# EAGLE board module S-RX28_rev05 644 (EAGLE 9.3.1)
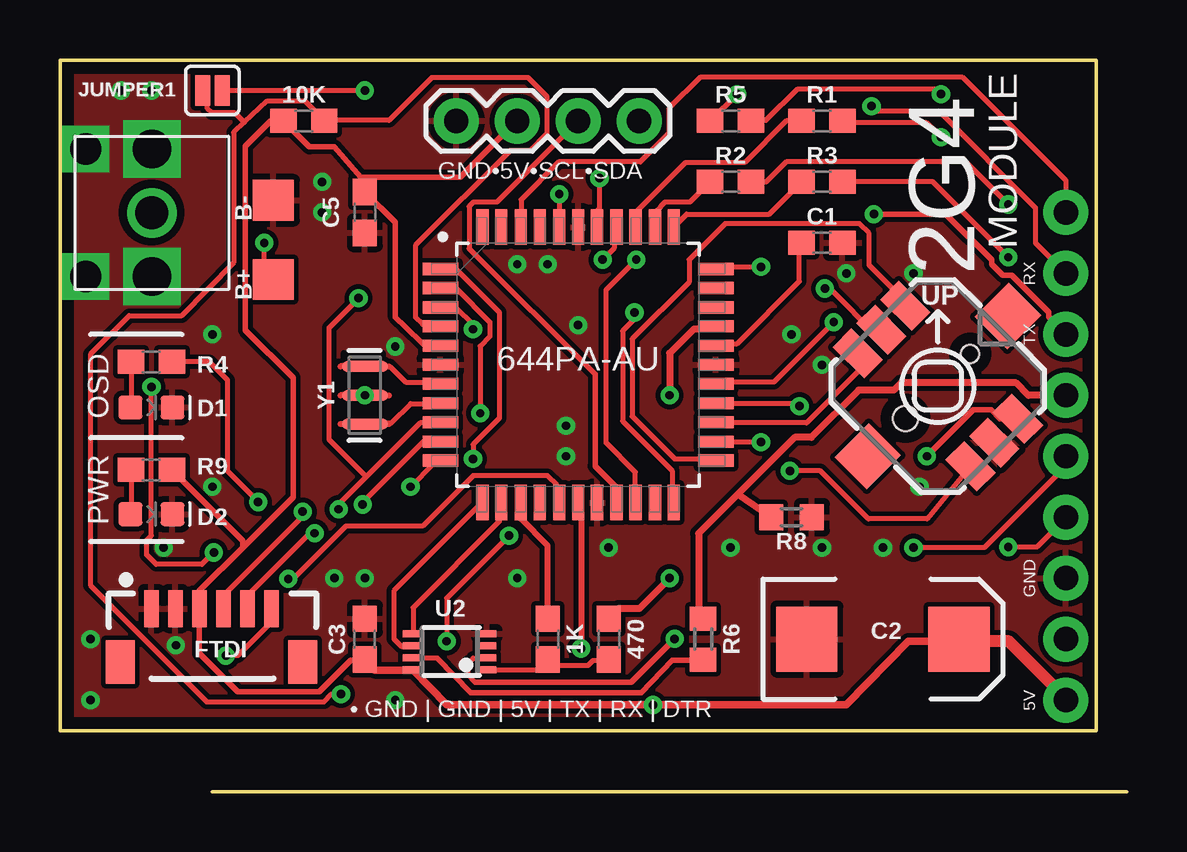
[diagram p0: board, top side]
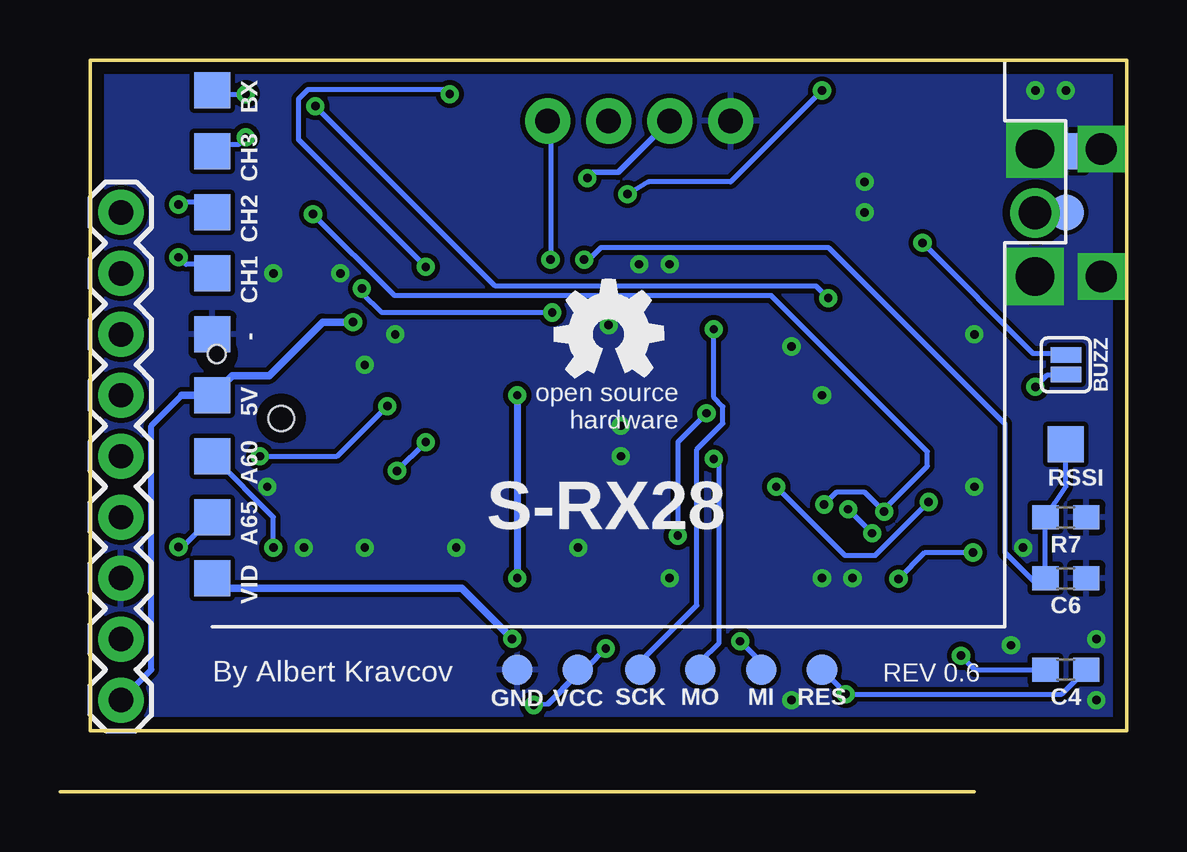
[diagram p1: board, bottom side, seen from below]

Size 44.45 x 30.48 mm. Coordinates in mm from the lower left corner, seen from the top.
Outline: 0,2.54 0,30.48 43.18,30.48 43.18,2.54 0,2.54
Copper layers (1*16): Top 0.035mm / dielectric 1.5mm / Bottom 0.035mm
Design rules "default *": minimum track width 6mil, minimum drill 0.35mm, track to track 6mil, track to pad 6mil, pad to pad 6mil, via to via 6mil, smd to smd 6mil, copper to edge 0.5mm, drill to drill 6mil, minimum pad ring 10mil, minimum via ring 8mil, stop-mask expansion 4mil, vias tented up to drill 2mm, thermal gap 10mil
Net classes: 0 default: width 0.2 mm, clearance 0.2 mm; 1 power: width 0.3 mm, drill 0.3 mm, clearance 0.3 mm
tRestrict: area 11.8,14.7 to 13.5,18.3

## Footprints (pad centres in the part's own frame; a part is rotated, then mirrored left to right if it is on the bottom)
0603 = smd 1.1 x 1: 1 -0.85,0; 2 0.85,0
TP15SQ = smd 1.5 x 1.5: TP 0,0
TP15R = smd 1.5 x 1.5: TP 0,0
TP17SQ = smd 1.7 x 1.7: TP 0,0
SMT-JUMPER_2_NC_PASTE_SILK = smd 0.635 x 1.27: 1 -0.406,0; 2 0.406,0
EIA7343 = smd 2.55 x 2.7: A 3.17,0; C -3.17,0
C0603 = smd 1.1 x 1: 1 -0.85,0; 2 0.85,0
LED-0603 = smd 1 x 1: A -0.877,0; C 0.877,0
1X06-1MM = smd 0.6 x 1.55: 1 -2.54,1.27; 2 -1.54,1.27; 3 -0.54,1.27; 4 0.46,1.27; 5 1.46,1.27; 6 2.46,1.27 | smd 1.2 x 1.8: P$1 -3.84,-0.955; P$2 3.76,-0.955
B1,27 = smd 1.27 x 1.27: TP 0,0
1X04 = drill 1.016 pad 1.88: 1 0,0; 2 2.54,0; 3 5.08,0; 4 7.62,0
1X09 = drill 1.016 pad 1.88: 1 0,0; 2 2.54,0; 3 5.08,0; 4 7.62,0; 5 10.16,0; 6 12.7,0; 7 15.24,0; 8 17.78,0; 9 20.32,0
R0603 = smd 1 x 1.1: 1 -0.85,0; 2 0.85,0
JOYSTICK_MINI = smd 1.85 x 1.1: A -3.325,1.4; B 3.325,1.4; C -3.325,-1.4; CTR -3.325,0; D 3.325,-1.4; GND 3.325,0 | smd 1.9 x 2: NC 0,4.13; NC@0 0,-4.13 | hole 0.75: 0,1.9 | hole 1.05: 0,-1.9
QFP80P1200X1200X120-44N = smd 1.473 x 0.508: 1 -5.74,3.988; 2 -5.74,3.2; 3 -5.74,2.388; 4 -5.74,1.6; 5 -5.74,0.787; 6 -5.74,0; 7 -5.74,-0.787; 8 -5.74,-1.6; 9 -5.74,-2.388; 10 -5.74,-3.2; 11 -5.74,-3.988; 23 5.74,-3.988; 24 5.74,-3.2; 25 5.74,-2.388; 26 5.74,-1.6; 27 5.74,-0.787; 28 5.74,0; 29 5.74,0.787; 30 5.74,1.6; 31 5.74,2.388; 32 5.74,3.2; 33 5.74,3.988 | smd 0.508 x 1.473: 12 -3.988,-5.74; 13 -3.2,-5.74; 14 -2.388,-5.74; 15 -1.6,-5.74; 16 -0.787,-5.74; 17 0,-5.74; 18 0.787,-5.74; 19 1.6,-5.74; 20 2.388,-5.74; 21 3.2,-5.74; 22 3.988,-5.74; 34 3.988,5.74; 35 3.2,5.74; 36 2.388,5.74; 37 1.6,5.74; 38 0.787,5.74; 39 0,5.74; 40 -0.787,5.74; 41 -1.6,5.74; 42 -2.388,5.74; 43 -3.2,5.74; 44 -3.988,5.74
VFSOP-8 = smd 0.3 x 0.8: 1 0,0; 2 0.5,0; 3 1,0; 4 1.5,0; 5 1.5,3.1; 6 1,3.1; 7 0.5,3.1; 8 0,3.1
SMA_CONNECTOR = drill 1.37: ANT -0.02,-0.017 | drill 1.3 square: P$1 -2.67,2.743; P$2 2.64,2.743 | drill 1.6 square: P$3 -2.67,-0.017; P$4 2.64,-0.017
RESONATOR-SMD-3.2X1.3 = smd 0.45 x 1.905: 1 -1.2,0; 2 0,0; 3 1.2,0

## Placement (x,y rotation side)
1K  [0603]  20.32,6.35 270 top
5V  TPTP15SQ  [TP15SQ]  38.1,16.51 0 bottom
10K  [0603]  10.16,27.94 180 top
470  [0603]  22.86,6.35 270 top
-  TPTP15SQ  [TP15SQ]  38.1,19.05 0 bottom
A60  TPTP15SQ  [TP15SQ]  38.1,13.97 0 bottom
A65  TPTP15SQ  [TP15SQ]  38.1,11.43 0 bottom
ANT  TPTP15R  [TP15R]  2.54,24.13 0 bottom
B+  TPTP17SQ  [TP17SQ]  8.89,21.34 0 top
B-  TPTP17SQ  [TP17SQ]  8.89,24.64 0 top
BUZZ  JUMPER-SMT_2_NC_PASTE_SILK  [SMT-JUMPER_2_NC_PASTE_SILK]  2.54,17.78 270 bottom
BX  TPTP15SQ  [TP15SQ]  38.1,29.21 0 bottom
C1  100nF  [0603]  31.75,22.86 0 top
C2  470uf  [EIA7343]  34.29,6.35 0 top
C3  100nF  [C0603]  12.7,6.35 90 top
C4  100nF  [0603]  2.54,5.08 180 bottom
C5  100nF  [0603]  12.7,24.13 270 top
C6  0.1uF  [0603]  2.54,8.89 180 bottom
CH1  TPTP15SQ  [TP15SQ]  38.1,21.59 0 bottom
CH2  TPTP15SQ  [TP15SQ]  38.1,24.13 0 bottom
CH3  TPTP15SQ  [TP15SQ]  38.1,26.67 0 bottom
D1  [LED-0603]  3.81,16 0 top
D2  [LED-0603]  3.81,11.56 0 top
FTDI  [1X06-1MM]  6.35,6.35 0 top
G  TPTP15SQ  [TP15SQ]  2.54,26.67 0 bottom
GND  GND  [B1,27]  25.4,5.08 0 bottom
GND•5V•SCL•SDA  [1X04]  16.51,27.94 0 top
GOOGLE_IO  [1X09]  41.91,3.81 90 bottom
JUMPER1  JUMPER-SMT_2_NC_PASTE_SILK  [SMT-JUMPER_2_NC_PASTE_SILK]  6.35,29.21 0 top
MI  TPSQB1,27  [B1,27]  15.24,5.08 0 bottom
MO  TPSQB1,27  [B1,27]  17.78,5.08 0 bottom
R1  1k  [0603]  31.75,27.94 0 top
R2  1k  [0603]  27.94,25.4 0 top
R3  1k  [0603]  31.75,25.4 0 top
R4  330  [0603]  3.81,17.91 180 top
R5  1k  [0603]  27.94,27.94 0 top
R6  10R  [R0603]  26.8,6.35 90 top
R7  100k  [0603]  2.54,11.43 180 bottom
R8  75R  [R0603]  30.48,11.43 0 top
R9  330  [0603]  3.81,13.41 180 top
RES  TPSQB1,27  [B1,27]  12.7,5.08 0 bottom
RSSI  TPTP15SQ  [TP15SQ]  2.54,14.48 0 bottom
S2  [JOYSTICK_MINI]  36.58,16.89 315 top
SCK  TPSQB1,27  [B1,27]  20.27,5.08 0 bottom
U1  ATMEGA644PA-AU  [QFP80P1200X1200X120-44N]  21.59,17.78 0 top
U2  [VFSOP-8]  17.78,5.08 90 top
U$1  SMA_ANTENNA  [SMA_CONNECTOR]  3.81,24.13 90 top
U$2  [OSHW_5MM]  21.59,19.05 0 bottom
VCC  TPSQB1,27  [B1,27]  22.89,5.08 0 bottom
VID  TPTP15SQ  [TP15SQ]  38.1,8.89 0 bottom
Y1  16MHz  [RESONATOR-SMD-3.2X1.3]  12.7,16.51 90 top

## Library data of the parts
1K 10K 470 = SparkFun-Resistors; PROD_ID: RES-08787
5V - A60 A65 ANT B+ B- BX CH1-CH3 G GND MI MO RES RSSI SCK VCC VID = testpad
BUZZ JUMPER1 = SparkFun-Jumpers
C1 C4-C6 = SparkFun-Capacitors; PROD_ID: CAP-00867
C2 = SparkFun-Passives
C3 = adafruit
D1 D2 = SparkFun-LED
FTDI = SparkFun-Connectors; PROD_ID: CONN-08249; SF_ID: GPS-00579
GND•5V•SCL•SDA = SparkFun-Connectors; PROD_ID: CONN-09696
GOOGLE_IO = SparkFun-Connectors
R1-R3 R5 R7 R9 = SparkFun-Resistors; PROD_ID: RES-12535
R4 = SparkFun-Resistors; PROD_ID: RES-12535; VALUE: 0.05
R6 R8 = resistor
S2 = SparkFun-Switches; PROD_ID: SWCH-09905; SF_SKU: COM-10063
U1 = ATMEGA644PA-AU; AVAILABILITY: Unavailable; DESCRIPTION: ATmega Series 20 MHz 64 KB Flash 4 KB SRAM 8-Bit Microcontroller - TQFP-44; MF: Microchip; MP: ATMEGA644PA-AU; PACKAGE: TQFP-44 Microchip; PRICE: None
U2 = ts5a3359
U$1 = #fpv
U$2 = oshw
Y1 = SparkFun-Clocks; PROD_ID: XTAL-08900

## Nets
5V: 5V.TP 10K.2 C2.A C3.1 C5.1 FTDI.3 GND•5V•SCL•SDA.2 GOOGLE_IO.1 R9.1 U1.5 U1.17 U1.27 U1.38 U2.8 VCC.TP
A_L: A60.TP GOOGLE_IO.5
A_R: A65.TP GOOGLE_IO.4
ANT [power]: ANT.TP U$1.ANT
AREF: C1.1 U1.29
BT0: S2.CTR U1.22
BT1: S2.A U1.23
BT2: S2.D U1.24
BT3: S2.C U1.25
BT4: S2.B U1.26
BUZZER: BUZZ.2 U1.16
BX: R5.1 U1.33
C1: R3.1 U1.34
C2: R2.1 U1.35
C3: R1.1 U1.36
CH1: GOOGLE_IO.9 U1.42
CH2/RXD0: FTDI.5 GOOGLE_IO.8 U1.9
CH3/TXD0: FTDI.4 GOOGLE_IO.7 U1.10
DTR: C4.2 FTDI.6
GND: -.TP B-.TP C1.2 C2.C C3.2 C5.2 C6.1 D1.C D2.C FTDI.1 FTDI.2 G.TP GND.TP GND•5V•SCL•SDA.1 GOOGLE_IO.3 R7.1 R8.2 S2.GND U1.6 U1.18 U1.28 U1.39 U2.4 U$1.P$1 U$1.P$2 U$1.P$3 U$1.P$4 Y1.2
LED: R4.1 U1.11
MI: MI.TP U1.2
MO: MO.TP U1.1
N$1: CH3.TP R1.2
N$2: B+.TP BUZZ.1
N$3: CH2.TP R2.2
N$4: CH1.TP R3.2
N$5: BX.TP R5.2
OSD_CONTR1: U1.13 U2.5
OSD_CONTR2: U1.12 U2.6
OSD_OUT: 1K.2 470.2 U2.1
RED: D1.A R4.2
RED1: D2.A R9.2
RES: 10K.1 C4.1 JUMPER1.1 RES.TP U1.4
RESPIN: JUMPER1.2 U1.40
RSSI_IN: C6.2 R7.2 RSSI.TP U1.37
SCK: SCK.TP U1.3
SCL: GND•5V•SCL•SDA.3 U1.19
SDA: GND•5V•SCL•SDA.4 U1.20
SYNC: 1K.1 U1.14
VIDEO [power]: GOOGLE_IO.6 R6.2 R8.1
VIDEO_MOD: U2.2 VID.TP
VIDEOOUTPUT: R6.1 U2.7
VSIG [power]: 470.1 U1.30
XTAL1: U1.8 Y1.1
XTAL2: U1.7 Y1.3

## Tracks (layer width: path | path; a pad name or v marks a point on that pad's centre or on a via)
5V  (via drill 0.35)
  Top 0.2: v32.24,19.56 29.74,17.06 27.41,17.06 U1.27 | 37.48,6.26 C2.A 37.38,6.26 | 41.91,3.89 GOOGLE_IO.1 | 15.11,18.66 15.81,18.66 U1.5 | v22.48,25.56 22.48,24.29 22.31,24.11 22.31,23.56 U1.38 | 21.71,11.86 21.61,11.96 U1.17 | 13.11,5.06 12.71,5.46 C3.1 12.61,5.46 | 14.61,5.06 U2.8 14.71,5.06 | FTDI.3 5.81,8.36
  Top 0.229: 15.11,18.66 14.38,19.36 13.97,19.77 13.97,23.71 C5.1 12.7,25.4 12.54,25.59 | 5.81,8.36 7.62,10.16 | 7.62,10.16 9.71,12.26 9.71,17.24 7.73,19.23 7.73,26.89 8.78,27.94 10K.2 10.39,26.86 11.43,26.86 12.54,25.59 | 12.61,5.46 12.11,5.46 10.81,4.16 7.41,4.16 5.81,5.76 FTDI.3 | 12.54,25.59 16.68,25.59 19.05,27.96 GND•5V•SCL•SDA.2 | R9.1 7.62,10.46 7.62,10.16 | R9.1
  Top 0.254: 21.71,11.86 v21.71,5.96
  Top 0.305: 13.11,5.06 14.61,5.06 | 14.71,5.06 16.11,3.61 v24.71,3.61 32.75,3.61 35.35,6.26 37.38,6.26
  Top 0.508: 37.48,6.26 39.54,6.26 41.91,3.89
  Bottom 0.2: 38.32,16.12 38.72,16.51 | 22.51,5.16 22.81,5.16 VCC.TP 22.91,5.06 22.91,4.86 | v24.71,3.61 24.11,3.66
  Bottom 0.229: v21.71,5.96 22.51,5.16 | 24.11,3.66 22.91,4.86 | GND•5V•SCL•SDA.2 21.19,25.8 22.24,25.8 v22.48,25.56
  Bottom 0.254: GOOGLE_IO.1 40.64,5.08 40.64,15.24 39.37,16.51
  Bottom 0.3: 5V.TP 38.32,16.29 38.32,16.12
  Bottom 0.305: 39.37,16.51 38.72,16.51 | v32.24,19.56 33.51,19.56 35.74,17.33 37.28,17.33 5V.TP
A_L  (via drill 0.35)
  Top 0.203: v35.56,10.16 38.52,10.16 41.77,13.41 41.91,13.41 GOOGLE_IO.5
  Bottom 0.2: 38.01,14.06 A60.TP
  Bottom 0.203: v35.56,10.16 35.56,11.43 38.01,13.88
  Bottom 0.3: 38.01,13.88 38.01,14.06
A_R  (via drill 0.35)
  Top 0.2: v39.51,10.19 40.71,10.19 41.91,11.39 GOOGLE_IO.4
  Bottom 0.2: v39.51,10.19 39.34,10.19 A65.TP
ANT
  Bottom 0.3: ANT.TP 2.56,24.11
  Bottom 0.762: 2.56,24.11 U$1.ANT
AREF
  Top 0.2: C1.1 30.81,22.86 30.81,21.26 28.21,18.66 27.41,18.66 U1.29
BT0  (via drill 0.35)
  Top 0.2: v23.94,19.96 23.94,19.69 23.44,19.19 23.44,15.43 25.51,13.36 25.51,12.06 U1.22 | v31.87,20.96 32.07,20.96 34.1,18.93 35.01,18.93 34.69,18.77 S2.CTR
  Bottom 0.2: v23.94,19.96 31.04,19.96 31.87,20.79 v31.87,20.96
BT1
  Top 0.2: S2.A 35.22,20.43 33.71,21.93 33.71,23.26 33.31,23.66 27.71,23.66 26.21,22.16 26.21,21.23 23.84,18.86 23.84,15.63 25.61,13.86 27.31,13.86 U1.23
BT2  (via drill 0.35)
  Top 0.2: v29.21,14.56 27.41,14.56 U1.24 | S2.D 36.13,11.36 33.68,11.36 31.68,13.36 v30.41,13.36
  Bottom 0.2: v30.41,13.36 v29.21,14.56
BT3
  Top 0.2: U1.25 27.41,15.36 31.11,15.36 33.59,17.84 33.54,17.87 S2.C
BT4  (via drill 0.35)
  Top 0.2: v30.81,16.06 30.71,16.16 27.41,16.16 U1.26
  Top 0.229: S2.B 39.16,15.53 38.79,15.9 38.05,15.9 v36.12,13.97
  Bottom 0.2: v36.12,13.97 32.9,13.97 v30.81,16.06
BUZZER  (via drill 0.35)
  Top 0.2: U1.16 20.71,12.06 20.71,12.76 20.31,13.16 17.21,13.16 15.11,11.06 11.91,11.06 9.71,8.86 v9.51,8.86 | v3.81,16.86 3.81,10.66 3.61,10.46 3.61,9.86 4.01,9.46 5.91,9.46 v6.41,9.96
  Bottom 0.2: v3.81,16.86 3.31,17.36 2.61,17.36 BUZZ.2 | v6.41,9.96 8.41,9.96 v9.51,8.86
BX  (via drill 0.35)
  Top 0.2: v28.21,29.06 R5.1 | v29.21,21.86 27.41,21.86 U1.33
  Bottom 0.2: v28.21,29.06 28.23,29.06 28.43,29.26 34.11,29.26 34.51,28.86 34.51,27.16 v29.21,21.86
C1
  Top 0.2: R3.1 29.56,24.06 26.11,24.06 25.61,23.56 U1.34
C2
  Top 0.2: U1.35 24.81,23.56 24.81,24.13 25.02,24.34 25.02,24.38 25.2,24.56 26.25,24.56 R2.1
C3
  Top 0.2: U1.36 24.01,23.56 24.01,24.16 26.05,26.2 28.52,26.2 30.26,27.94 R1.1
CH1
  Top 0.2: U1.42 19.21,23.56 19.21,24.66 20.79,26.24 24.18,26.24 25.37,27.43 25.37,28.46 26.67,29.76 37.61,29.76 41.91,25.46 GOOGLE_IO.9
CH2/RXD0  (via drill 0.35)
  Top 0.2: 12.76,13.11 11.61,11.96 v11.61,11.76 | 12.76,13.11 15.01,15.36 15.81,15.36 U1.9 | v10.61,10.76 10.41,10.76 7.81,8.16 FTDI.5 | GOOGLE_IO.8 40.64,22.86 40.64,24.33 36.61,28.36 34.01,28.36 v33.81,28.56 | v12.44,20.56 11.21,19.33 11.21,14.66 12.76,13.11
  Bottom 0.2: v10.61,10.76 v11.61,11.76 | v33.81,28.56 26.31,21.06 12.94,21.06 v12.44,20.56
CH3/TXD0  (via drill 0.35)
  Top 0.2: v12.61,11.96 12.61,12.06 15.11,14.56 15.81,14.56 15.83,14.58 U1.10 | v10.11,11.66 10.11,11.46 6.81,8.16 FTDI.4 | 41.91,19.09 GOOGLE_IO.7 | 36.83,24.06 36.91,24.06
  Top 0.229: v33.91,24.06 36.83,24.06 | 41.91,19.09 41.88,19.09 41.19,19.78 41.19,19.98 39.66,21.51 39.29,21.51 38.82,21.97 38.82,22.15 36.91,24.06
  Bottom 0.2: v12.61,11.96 12.11,12.46 10.91,12.46 v10.11,11.66 10.11,11.76 8.31,13.56 8.31,14.16 14.81,20.66 30.51,20.66 v33.91,24.06
DTR  (via drill 0.35)
  Top 0.2: v6.91,5.66 7.41,5.66 8.81,7.06 FTDI.6
  Bottom 0.2: v6.91,5.66 6.33,5.08 C4.2
GND  (via drill 0.35)
  other vias: 1.27,6.35 6.35,19.05 10.92,25.4 10.92,24.13 2.54,29.21 3.81,29.21 6.35,12.7 4.32,10.16 21.08,15.24 21.08,13.97 21.59,19.43 19.05,21.97 30.48,19.05 31.75,17.78 32.77,21.59 27.94,10.16 22.86,10.16 31.75,10.16 12.7,8.89 11.43,8.89 13.97,3.81 1.27,3.81 4.83,6.1 12.7,16.51 13.97,18.54 19.05,8.89 35.81,12.7 35.56,21.59 34.29,10.16 20.32,21.97
  pour Top: -7.62,33.02 50.8,33.02 50.8,-2.54 -7.62,-2.54
  pour Bottom: -8.89,-2.54 -8.89,40.64 48.26,40.64 48.26,-2.54
LED  (via drill 0.35)
  Top 0.2: v8.26,12.07 6.98,13.34 6.98,17.14 6.22,17.91 R4.1 | v14.61,12.7 15.56,13.65 U1.11
  Bottom 0.2: v8.26,12.07 10.48,9.84 11.75,9.84 v14.61,12.7
MI  (via drill 0.35)
  Top 0.2: v16.11,6.26 16.11,8.06 v18.71,10.66 | v17.51,15.76 17.51,18.56 17.91,18.96 17.91,19.56 16.51,20.96 15.91,20.96 U1.2
  Bottom 0.2: v16.11,6.26 15.31,5.46 15.31,5.16 MI.TP | v18.71,10.66 18.71,14.56 v17.51,15.76
MO  (via drill 0.35)
  Top 0.2: v17.21,13.86 17.21,14.46 18.31,15.56 18.31,19.96 16.51,21.76 15.91,21.76 U1.1
  Bottom 0.2: v17.21,13.86 17.01,13.66 17.01,6.16 17.71,5.46 17.71,5.16 MO.TP
N$1  (via drill 0.35)
  Top 0.2: v36.71,27.26 36.11,27.86 32.61,27.86 R1.2
  Bottom 0.2: v36.71,27.26 37.01,26.96 37.81,26.96 CH3.TP
N$2  (via drill 0.35)
  Top 0.2: v8.51,22.86 8.51,21.66 8.81,21.36 B+.TP
  Bottom 0.2: v8.51,22.86 3.91,18.26 2.61,18.26 BUZZ.1
N$3  (via drill 0.35)
  Top 0.2: v39.51,24.46 37.71,26.26 30.29,26.26 29.43,25.4 R2.2
  Bottom 0.2: v39.51,24.46 39.41,24.56 38.51,24.56 38.11,24.16 CH2.TP
N$4  (via drill 0.35)
  Top 0.2: v39.51,22.26 36.37,25.4 R3.2
  Bottom 0.2: v39.51,22.26 39.21,21.96 38.41,21.96 38.11,21.66 CH1.TP
N$5  (via drill 0.35)
  Top 0.2: v36.71,29.06 36.51,29.26 30.71,29.26 29.41,27.96 28.81,27.96 R5.2
  Bottom 0.2: v36.71,29.06 37.91,29.06 38.01,29.16 BX.TP
OSD_CONTR1
  Top 0.2: U2.5 14.71,6.66 14.71,7.66 18.31,11.26 18.31,11.96 U1.13
OSD_CONTR2
  Top 0.2: U2.6 14.61,6.06 14.21,6.06 13.91,6.36 13.91,8.36 17.51,11.96 U1.12
OSD_OUT
  Top 0.2: U2.1 17.81,5.06 19.91,5.06 20.31,5.46 1K.2 20.41,5.46 20.61,5.26 22.01,5.26 22.21,5.46 22.81,5.46 470.2
RED
  Top 0.2: R4.2 2.96,16.18 2.93,16.18 D1.A
RED1
  Top 0.2: R9.2 2.96,11.56 D2.A
RES  (via drill 0.35)
  Top 0.2: 11.01,27.96 13.71,27.96 15.51,29.76 19.49,29.76 20.29,28.96 20.29,27.43 19.56,26.7 18.75,26.7 14.81,22.76 14.81,19.76 15.11,19.46 15.81,19.46 U1.4 | v11.71,4.06 11.31,4.06 11.01,3.73 6.11,3.73 3.66,6.2 1.27,8.6 1.27,18.21 2.88,19.83 5.08,19.83 7.24,22.04 7.24,27.46 7.68,27.88 | 7.68,27.88 8.61,28.76 10.21,28.76 11.01,27.96 | 11.01,27.96 10K.1 | 7.68,27.88 7.28,28.28 6.31,28.28 6.14,28.45 6.14,29.02 JUMPER1.1
  Bottom 0.2: RES.TP 11.71,4.09 v11.71,4.06 2.71,4.06 C4.1
RESPIN  (via drill 0.35)
  Top 0.2: JUMPER1.2 v12.7,29.21 | v20.8,24.89 U1.40
  Bottom 0.2: v12.7,29.21 16.51,25.4 19.94,25.4 v20.8,24.89
RSSI_IN  (via drill 0.35)
  Top 0.2: v22.61,22.16 23.11,22.66 23.11,23.46 U1.37
  Bottom 0.2: v22.61,22.16 22.41,22.16 21.91,22.66 12.42,22.66 5.08,15.32 5.08,9.96 3.7,8.58 C6.2 R7.2 2.54,12.7 RSSI.TP
SCK  (via drill 0.35)
  Top 0.2: v17.21,19.26 17.21,19.46 16.51,20.16 15.91,20.16 U1.3
  Bottom 0.2: SCK.TP 20.21,5.16 20.21,5.46 17.91,7.76 17.91,14.26 16.83,15.34 16.83,16.04 17.21,16.42 v17.21,19.26
SCL
  Top 0.2: 22.29,17.38 17.05,22.62 17.05,24.38 17.22,24.56 18.21,24.56 GND•5V•SCL•SDA.3
  Top 0.229: U1.19 23.19,12.66 22.29,13.56 22.29,17.38
SDA  (via drill 0.35)
  Top 0.2: v24.01,22.16 22.74,20.89 | 22.74,20.89 22.74,14.55 23.98,13.31 U1.20
  Top 0.203: 22.74,20.89
  Bottom 0.2: v24.01,22.16 24.01,28.03 24.08,28.11 GND•5V•SCL•SDA.4
SYNC
  Top 0.2: 19.21,11.36 19.21,11.96 U1.14 | 20.31,7.26 1K.1
  Top 0.254: 20.31,7.26 20.31,10.26 19.21,11.36
VIDEO
  Top 0.3: 28.24,12.39 30.61,14.76 31.31,14.76 33.27,16.72 34.75,16.72 35.05,17.02 39.84,17.02 40.35,16.51 GOOGLE_IO.6 | 28.24,12.39 26.61,10.76 26.61,7.46 R6.2 | R8.1 28.24,12.39
VIDEO_MOD  (via drill 0.35)
  Top 0.2: 17.21,5.56 17.71,5.56 U2.2
  Top 0.203: 17.21,5.56 17.01,5.36 17.01,4.86
  Top 0.216: 17.31,4.56 17.01,4.86
  Top 0.229: 23.81,4.56 17.31,4.56
  Top 0.254: v25.61,6.36 23.81,4.56
  Bottom 0.2: 37.61,8.46 38.01,8.86 VID.TP
  Bottom 0.305: v25.61,6.36 27.71,8.46 37.61,8.46
VIDEOOUTPUT
  Top 0.2: 15.71,5.56 14.71,5.56 U2.7 | 26.71,5.46 R6.1
  Top 0.229: 15.71,5.56 17.11,4.12 24.21,4.12 25.51,5.46 26.71,5.46
VSIG  (via drill 0.35)
  Top 0.3: U1.30 27.22,19.27 26.41,19.27 25.4,18.26 v25.4,16.51 | 470.1 23.28,7.62 24.13,7.62 v25.4,8.89
  Bottom 0.3: v25.4,16.51 v25.4,8.89
XTAL1
  Top 0.2: U1.8 15.81,16.16 14.61,16.16 13.81,15.36 Y1.1
XTAL2
  Top 0.2: U1.7 15.81,17.06 14.41,17.06 13.81,17.66 Y1.3

## Text on the board
tPlace: RX | TX | GND | • GND | GND | 5V | TX | RX | DTR | 5V
bPlace: REV 0.6 | By Albert Kravcov
tNames: 2G4 | • | MODULE | 644PA-AU | OSD | PWR
bNames: S-RX28